# Altium PCB expansion.PcbDoc
Units mil, origin at the board's own origin, x right, y up, seen from the top; angles counter-clockwise.
Board outline 910.59 x 872.97 mil, 4 copper layers (Top Layer, Layer SCL, Layer SDA, Bottom Layer), stack 14.156 mil thick; 15 components, 6 nets, 78 pads, 33 vias.
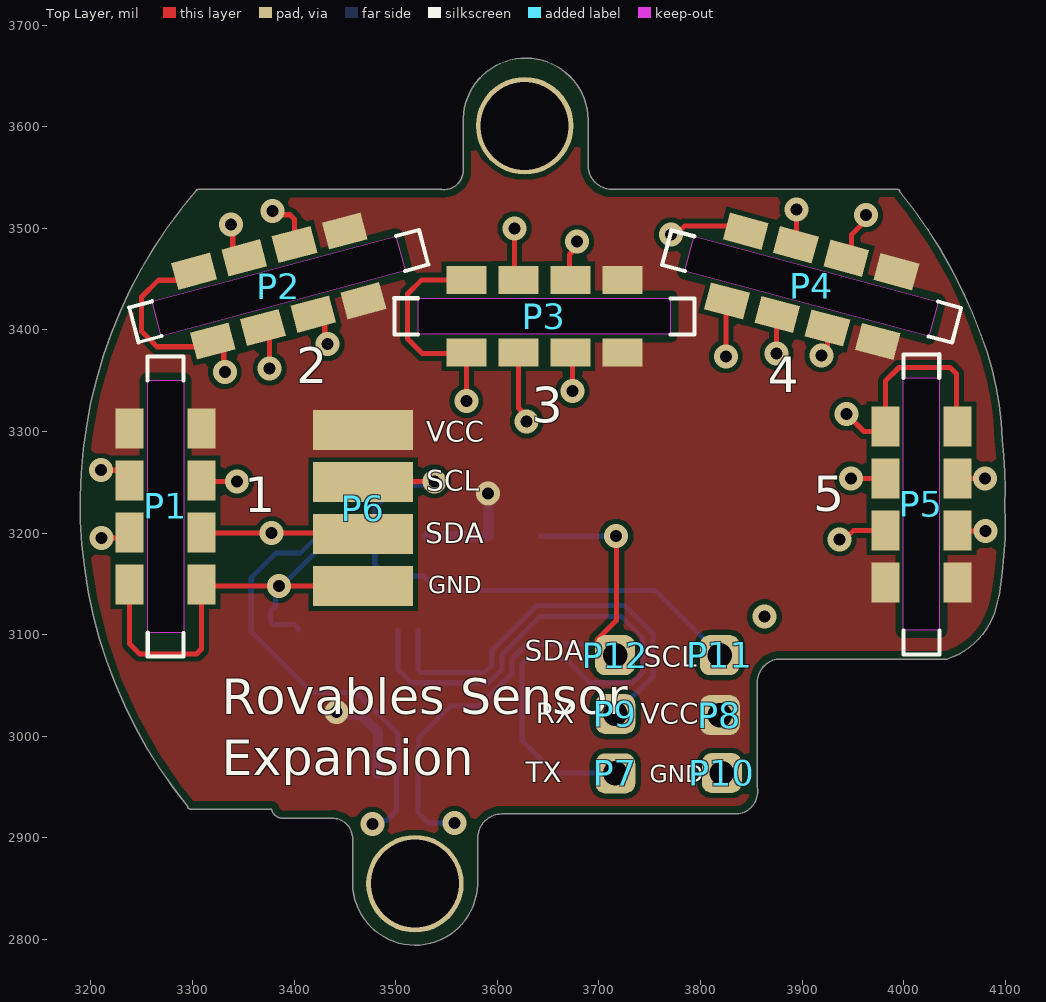
[diagram p0: Top Layer view]
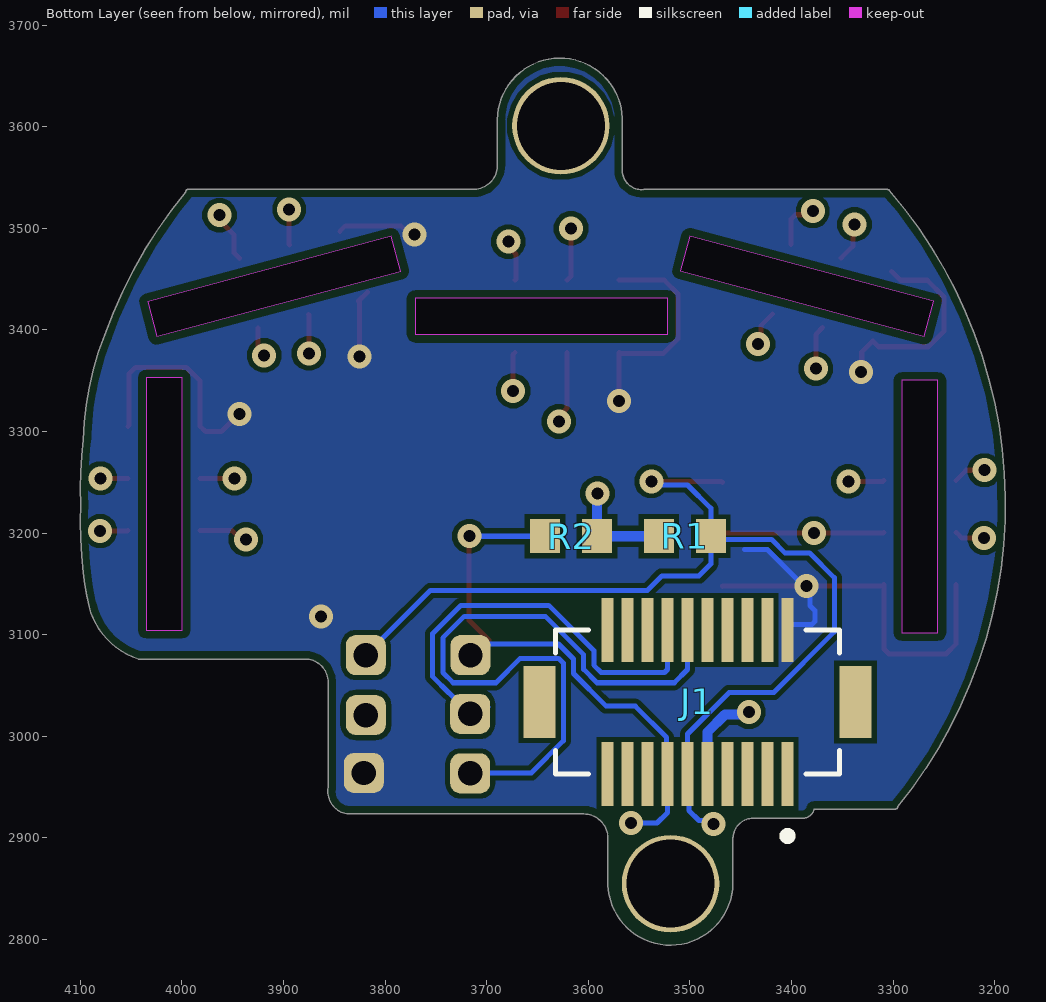
[diagram p1: Bottom Layer view, seen from below]
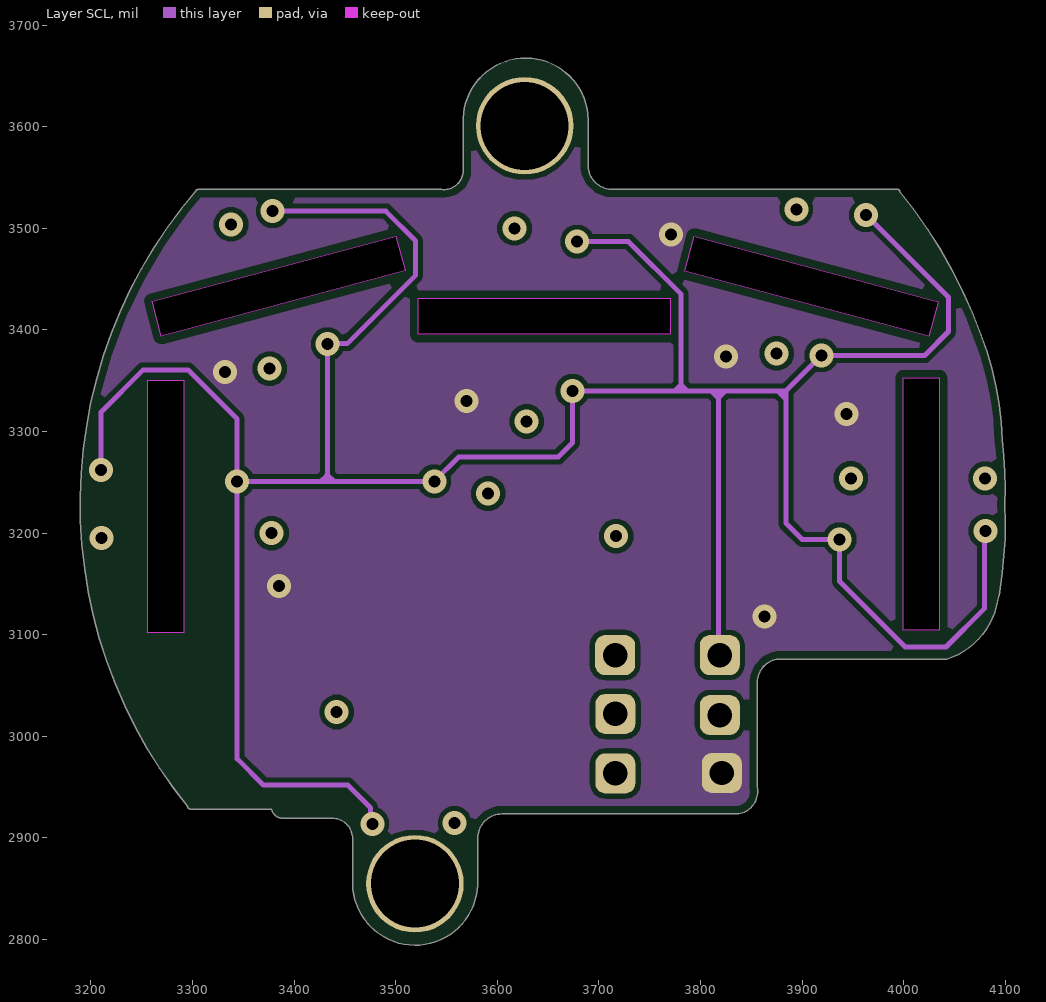
[diagram p2: Layer SCL]
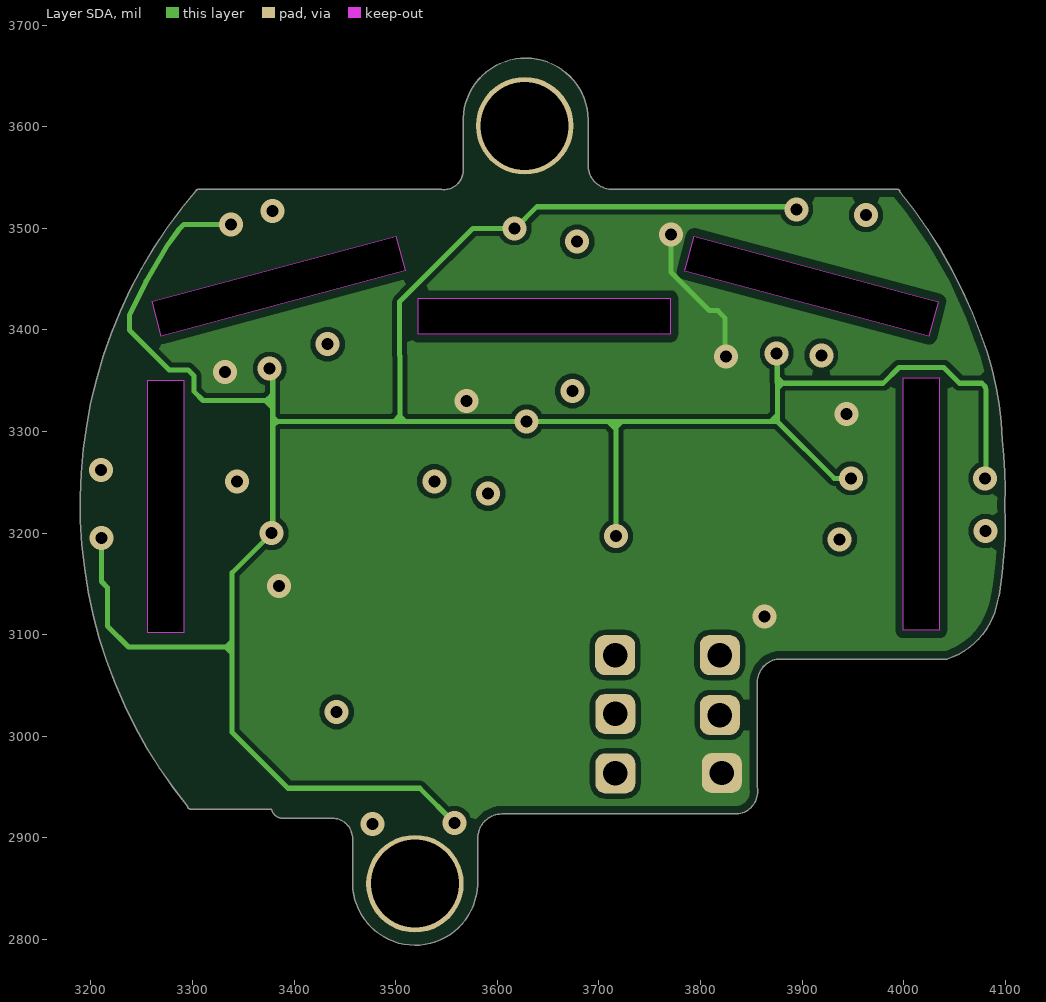
[diagram p3: Layer SDA]
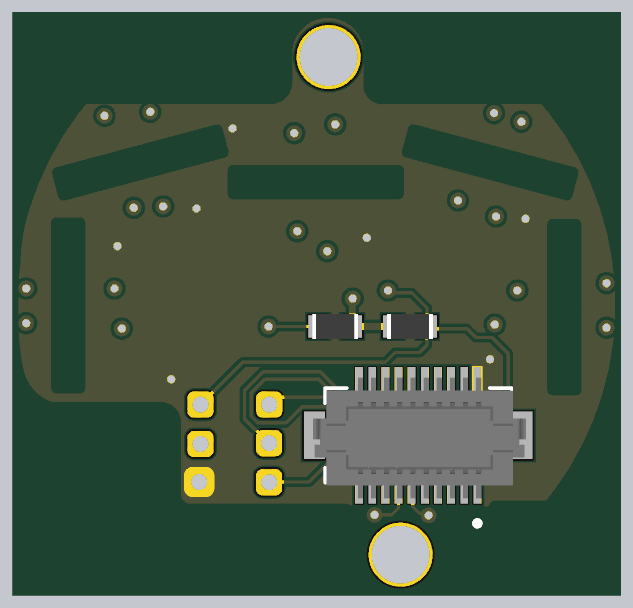
[diagram p4: 3D render of the assembled board from below, using the file's embedded part models]

## Layer stack, top to bottom
Top Solder: solder mask 0.4, Solder Resist, Dk 3.5
Top Layer: signal copper 1.4
Dielectric 2: prepreg 2.8, PP-006, Dk 4.1
Layer SCL: signal copper 1.378
Dielectric 3: prepreg 2.8, PP-006, Dk 4.1
Layer SDA: signal copper 1.378
Dielectric 1: core 3, FR-4, Dk 4.2
Bottom Layer: signal copper 1.4
Bottom Solder: solder mask 0.4, Solder Resist, Dk 3.5

## Board outline
3388.99,2919.49 3436,2919.49 ccw(c3436,2921.97) 3436.17,2919.49 cw(c3437.55,2899.49) 3457.59,2900.91 3457.59,2855 ccw(c3460.62,2854.99) 3457.6,2854.88 cw(c3462.69,2855.03) 3457.59,2855.02 cw(c3460.52,2855.06) 3457.59,2855.06 3457.6,2854.88 ccw(c3519.14,2856) 3580.69,2853.78 ccw(c3580.33,2853.85) 3580.7,2854 3580.7,2899.93 cw(c3604.72,2899.63) 3604.47,2923.68 3837.68,2923.68 ccw(c3833.68,2945.99) 3856,2950 3856,3030.26 3856,3053.35 cw(c3878.95,3053.23) 3878.83,3076.17 3982.51,3076.17 4043,3076.17 ccw(c4019.95,3146.21) 4091.3,3127.6 ccw(c3903.99,3176.75) 4097,3161 ccw(c3710.05,3210.11) 4099.69,3228.03 ccw(c3728.16,3244.44) 4097,3292 ccw(c3798.55,3284.77) 4091.3,3343.26 ccw(c3786.77,3282.21) 4076.15,3395.03 ccw(c3627.16,3233.78) 3996.3,3535.99 ccw(c3996.28,3535.99) 3996.27,3536 ccw(c3993.79,3536.03) 3993.76,3538.51 3714,3538.51 ccw(c3713.94,3538.47) 3713.88,3538.51 cw(c3713.01,3561.99) 3689.53,3561.1 ccw(c3689.18,3561.19) 3689.51,3561.35 3689.51,3606 ccw(c3688.62,3606.16) 3689.46,3606.48 ccw(c3688.45,3606.85) 3689.51,3607 ccw(c3689.5,3607.02) 3689.51,3607.04 ccw(c3627.95,3606.05) 3566.42,3608.3 ccw(c3568.07,3608.05) 3566.41,3608 3566.41,3555.08 ccw(c3568.9,3555.08) 3566.43,3554.72 cw(c3547.46,3557.33) 3545.3,3538.3 cw(c3545.29,3538.29) 3545.28,3538.3 3545.3,3538.3 ccw(c3545.13,3537.99) 3545,3538.32 3305.63,3538.29 ccw(c3305.51,3536.01) 3303.71,3537.42 ccw(c3662.6,3229.11) 3295.33,2930.84 ccw(c3297.84,2931) 3297.84,2928.49 3377.76,2928.49 ccw(c3389,2931)

## Design rules (kind name [scope] priority, off if disabled: settings)
BoardOutlineClearance [All] p1: gap=7.87 ignorepadtopadclearanceinfootprint=FALSE
Clearance [All] p1: gap=5 ignorepadtopadclearanceinfootprint=FALSE except(9.84: Arc-Hole Track-Hole SMDPad-Hole THPad-Hole Via-Hole Fill-Hole Poly-Hole Region-Hole Text-Hole)
ComponentClearance [All] p1: gap=5 collisioncheckmode=3 verticalgap=5 showdistances=TRUE
DiffPairsRouting [All] p1: maxlimit=10 minlimit=5 mostfreqgap=10 toplayer_prefgap=5 toplayer_minwidth=5 toplayer_maxwidth=1000 toplayer_prefwidth=5 midlayer1_mingap=10 midlayer1_minwidth=15 midlayer1_maxwidth=15 midlayer1_prefwidth=15 midlayer2_mingap=10 midlayer2_minwidth=15 midlayer2_maxwidth=15 midlayer2_prefwidth=15 bottomlayer_prefgap=5 bottomlayer_minwidth=5 bottomlayer_maxwidth=1000 bottomlayer_prefwidth=5 maxuncoupledlength=500
Height [All] p1: minheight=0 maxheight=71497.94 prefheight=500
HoleSize [All] p1: absolutevalues=TRUE maxlimit=248.03 minlimit=11.81 maxpercent=80.000 minpercent=20.000
HoleToHoleClearance [All] p1: gap=9.84 allowstackedmicrovias=FALSE
MinimumAnnularRing [All] p1: minimumring=3
MinimumSolderMaskSliver [All] p1: minsoldermaskwidth=0
PlaneClearance [All] p1: clearance=5
PlaneConnect PlaneConnectPowerPads [InPadClass('PowerPads')] p1: planeconnectstyle=Direct reliefexpansion=20 reliefentries=4 reliefconductorwidth=10 reliefairgap=10
PlaneConnect [All] p2: planeconnectstyle=Direct reliefexpansion=11.81 reliefentries=4 reliefconductorwidth=5 reliefairgap=5
PolygonConnect PolygonConnectPowerPads [All vs (InPadClass('PowerPads'))] p1: connectstyle=Direct reliefconductorwidth=10 reliefentries=4 polygonreliefangle="90 Angle" airgapwidth=10
PolygonConnect [All] p2: connectstyle=Direct reliefconductorwidth=5 reliefentries=4 polygonreliefangle="90 Angle" airgapwidth=5
RoomDefinition expansion [InComponentClass('expansion')] p1: confinementstyle=ConfineIn formatcopy=TRUE lockcomponents=FALSE outline 0,0 2000,0 2000,1000 0,1000
RoutingVias [All] p1: holewidth=11.81 width=23.62 viastyle="Through Hole" minholewidth=11.81 minwidth=23.62 maxholewidth=23.62 maxwidth=259.84
SilkToSilkClearance [All] p1: silktosilkclearance=0
SilkToSolderMaskClearance [IsPad] p1: minsilkscreentomaskgap=5 clearancetoexposedcopper=TRUE
SolderMaskExpansion [All] p1: expansion=2.95 istentingtop=FALSE
Width [All] p1: maxlimit=1000 minlimit=5 preferedwidth=5 midlayer1_maxwidth=10 midlayer2_maxwidth=10 minimp=50.000000 maximp=50.000000 favimp=50.000000
20 further rules are at their usual default settings.

## Components (designator, comment, footprint, x,y, rotation, side; value= is the part's Value field where it differs from the comment)
J1 "DF12NB(3.0)-20DS-0.5V(51)" HRS_DF12NB(3.0)-20DS-0.5V(51) 3492.58,3033.87 r180 bottom
P1 "vertical_4pos_conn" "vertical_4pos_conn _s_square" 3255.85,3303.18 r0 top
P2 "vertical_4pos_conn" "vertical_4pos_conn _s_square" 3454.51,3480.19 r285 top
P3 "vertical_4pos_conn" "vertical_4pos_conn _s_square" 3723.18,3431.15 r270 top
P4 "vertical_4pos_conn" "vertical_4pos_conn _s_square" 3988.19,3440.09 r255 top
P5 "vertical_4pos_conn" "vertical_4pos_conn _s_square" 4035.15,3151.64 r180 top
P6 "vertical_4pos_conn" 4pos_conn_tof 3468,3301.36 r0 top
P7 "BB_TEST_TH" BB_WIRE_TEST_TH 3716.19,2963.59 r0 top
P8 "BB_TEST_TH" BB_WIRE_TEST_TH 3819,3021 r0 top
P9 "BB_TEST_TH" BB_WIRE_TEST_TH 3716.19,3022.12 r0 top
P10 "BB_TEST_TH" BB_WIRE_TEST_TH 3821,2964 r90 top
P11 "BB_TEST_TH" BB_WIRE_TEST_TH 3819,3080 r90 top
P12 "BB_TEST_TH" BB_WIRE_TEST_TH 3716,3080 r90 top
R1 "ERJ3EKF1002V" RESC1609X55X30LL15T15 3505,3197 r0 bottom
R2 "ERJ3EKF1002V" RESC1609X55X30LL15T15 3617,3197 r180 bottom

## Footprints (in the part's own frame and the unit in brackets; to place one, negate y for a bottom-side part, rotate by r counter-clockwise, add the part's x,y. Pads: shape width x height; smd on the part's side, far side on the other; paste and mask are expansions set on the pad)
4pos_conn_tof [mm]
  rect 2.5x1 smd: 1(0,0) 2(0,-1.3) 3(0,-2.6) 4(0,-3.9)
BB_WIRE_TEST_TH [mm]
  rrect50% 1x1 hole 0.61: 1(0,0)
HRS_DF12NB(3.0)-20DS-0.5V(51) [mm]
  rect 0.3x1.6 smd paste-2 mask+0.05: 1(2.25,-1.8) 2(2.25,1.8) 3(1.75,-1.8) 4(1.75,1.8) 5(1.25,-1.8) 6(1.25,1.8) 7(0.75,-1.8) 8(0.75,1.8) 9(0.25,-1.8) 10(0.25,1.8) 11(-0.25,-1.8) 12(-0.25,1.8) 13(-0.75,-1.8) 14(-0.75,1.8) 15(-1.25,-1.8) 16(-1.25,1.8) 17(-1.75,-1.8) 18(-1.75,1.8) 19(-2.25,-1.8) 20(-2.25,1.8)
  rect 0.8x1.8 smd: S1(3.95,0) S2(-3.95,0)
  silkscreen extent -3.55,-3.45 3.55,1.8, body extent -4,-2.4 4.1,2.2, height 2.2
RESC1609X55X30LL15T15 [mm] "Chip Resistor, 2-Leads, Body 1.75x0.95mm, IPC High Density"
  rect 0.75x0.85 smd: 1(-0.65,0) 2(0.65,0)
  body extent -0.87,-0.48 0.87,0.48, height 0.55
"vertical_4pos_conn _s_square" [mm]
  rect 0.7x1 smd: 1(-0.455,0) 1(1.35,0) 2(-0.455,-1.3) 2(1.35,-1.3) 3(-0.455,-2.6) 3(1.35,-2.6) 4(-0.455,-3.9) 4(1.35,-3.9)
  Keep-Out Layer board cut-out: 0,1.2 0.9,1.2 0.9,-5.11 0,-5.11
  silkscreen extent 0,-5.7 0.9,1.8

## Part data
J1: Package=None, Availability=Unavailable, MP=DF12NB(3.0)-20DS-0.5V(51), Price=None
R1 R2: library part CMP-1012-00623-3, "Chip Resistor, 10 KOhm, +/- 1%, 0.1 W, -55 to 155 degC, 0603 (1608 Metric), RoHS, Tape and Reel", Case Code (Imperial)=0603, Case Code (Metric)=1608, manufacturer=Panasonic, Max Operating Temperature=155degC, Max Power Dissipation=100mW, Min Operating Temperature=-55degC, Package Description="2-Pin Surface Mount Device, Body 1.6 x 0.85 mm", Package Quantity=1, Package Reference=603, Resistance=10KOhm, Temperature Coefficient=100ppm\/degreesC, Tolerance=1%, Voltage Rating=75V, Case\/Package=0603, Composition=ThickFilm, Contact Plating=Tin, Datasheet URL=https://industrial.panasonic.com/cdbs/www-data/pdf/RDA0000/AOA0000C304.pdf, Datasheet Version=02/2017, Depth=0.8mm, Height=0.45mm, Lead Free=LeadFree, Length=1.6mm, Manufacturer URL=http://www.panasonic.com/, Military Standard=Not, Mount=SurfaceMount, Mounting Technology=SurfaceMount, Number of Pins=2, Number of Terminations=2, Packaging=TapeandReel, Power Rating=100mW, Radiation Hardening=No, REACH SVHC=NoSVHC, RoHSCompliant=true, Termination=SMD/SMT, Voltage Rating (DC)=75V, Width=0.031inch

## Free pads (board coordinates)
  round 96 hole 86.61: 1(3519,2855) 1(3627,3601)

## Via types
v1: diameter 23.62, hole 11.81, Top Layer to Bottom Layer, tented both sides, 33 vias

## Nets (pads, with @x,y where several pads share a name; then routed paths per layer and width w, separated by ;. In a path a pad name is that pad's centre, name@x,y a point inside that pad or via, vN(x,y) a via of type N, cw(c..) or ccw(c..) an arc to the next point about the centre after c; other vN are vias at no path point)
GND: J1.2 P1.4 P2.4 P3.4 P4.4 P5.4 P6.4 P10.1 | length 1454.9
  Top Layer w5: P1.4@3237.94,3149.64 3237.94,3091.06 3248,3081 3304,3081 3309,3086 3309,3149.64 3310.64,3148 3467.82,3148 P6.4 ; P2.4@3301.56,3457.75 3292.79,3448.98 3266.37,3448.98 3249.81,3432.42 3249.81,3398.77 3265.06,3383.52 3314.36,3383.52 3319.96,3389.11 3330.82,3378.25 3330.82,3359.56 v1(3331.79,3358.59) ; v1(3569.64,3330) 3569.64,3378 3568.64,3377 3526.05,3377 3511.63,3391.42 3511.63,3435.45 3525.24,3449.06 P3.4@3569.64,3449.06 ; v1(3771,3494) 3776.04,3494 3784.57,3502.54 3839.12,3502.54 P4.4@3844.52,3497.13 ; P4.4@3817.35,3437.27 3826.13,3428.49 3825,3427.37 v1(3825,3374) ; v1@3946.17,3317.5 v1(3943.5,3317.5) 3961,3300 3976.82,3300 3982,3305.18 3982,3349.77 3995.42,3363.19 4045.81,3363.19 4052,3357 4052,3306.24 P5.4@4053.06,3305.18
  Layer SDA w5: v1(3771,3494) 3771,3456.96 3808.96,3419 3817,3419 3824,3412 3824,3375 v1(3825,3374)
  Bottom Layer w5: J1.2 3404,3106.59 3400.59,3110 3380,3110 3377,3113 3377,3123.98 3381.71,3128.69 3381.71,3144.71 3384.71,3144.71 3423.93,3183.93 3446.47,3183.93
  other v1: 3863,3118 3385,3148
RX: J1.14 P9.1 | length 415.9
  Bottom Layer w5: J1.14 3522.11,3065.74 3525.04,3062.81 3587.25,3062.81 3594.57,3070.13 3594.57,3084.56 3639.01,3129 3725.35,3129 3753.19,3101.17 3753.19,3058.83 3737.17,3042.81 3736.89,3042.81 P9.1 ; P9.1@3699,3029 P9.1@3701.7,3029
SCL: J1.11 P1.2 P2.2 P3.2 P4.2 P5.2 P6.2 P11.1 R1.1 | length 4570.6
  Top Layer w5: v1(3210.16,3261.97) 3227.96,3261.97 P1.2@3237.94,3252 ; P1.2@3309,3252 3310,3251 v1(3344,3251) ; v1(3379,3517) 3382.56,3513.44 3396.03,3513.44 3400.44,3509.03 P2.2@3400.44,3484.25 ; P2.2@3418.83,3415.61 3430.19,3404.25 3430.19,3388.81 v1(3433,3386) ; P6.2 3468.82,3251 v1(3538,3251) ; P3.2@3672,3378 3674,3376 v1(3674,3340) ; P3.2@3672,3449.06 3671,3450.06 3671,3474.29 3678.65,3481.93 v1(3678.65,3486.97) ; v1(3919,3375) 3925,3381 P4.2@3925,3402 ; v1(3937,3194) 3942.04,3194 3950.86,3202.82 P5.2@3982,3202.82 ; P4.2@3943.39,3470.64 3948.66,3475.91 3948.66,3493.62 3963,3507.96 v1(3963,3513) ; P5.2@4053.06,3202.82 4053.78,3202.1 v1(4080.4,3202.1)
  Layer SCL w5: v1(3210.16,3261.97) 3210.16,3319.4 3251.55,3360.8 3295.58,3360.8 3344,3312.38 v1(3344,3251) 3344,2978 3370,2952 3453,2952 3475.35,2929.65 3475.35,2915.65 v1(3477,2914) ; v1@3344.23,3250.77 3426.31,3250.77 ; v1(3379,3517) 3490.23,3517 3519.69,3487.54 3519.69,3453.9 3452.31,3386.52 3433.52,3386.52 v1(3433,3386) 3433,3256.59 ; 3438.8,3251.27 3433.48,3256.59 3433,3256.59 ; v1@3537.77,3250.77 3433,3250.77 ; v1(3538,3251) 3562,3275 3660,3275 3674,3289 v1(3674,3340) 3781,3340 ; v1(3678.65,3486.97) 3729.27,3486.97 3781,3435.25 3781,3346.11 ; 3775.12,3340.58 3780.66,3346.11 3781,3346.11 ; 3786.01,3340.04 3786.01,3341.1 3781,3346.11 ; P11.1@3817.84,3093.02 3817.84,3333.62 ; 3824.2,3339.69 3818.13,3333.62 3817.84,3333.62 ; 3883.25,3333.05 3877.42,3338.88 3877.42,3340 ; v1(3963,3513) 3963.36,3513 4044.2,3432.16 4044.2,3398.51 4020.69,3375 v1(3919,3375) 3884,3340 ; v1(4080.4,3202.1) 4079.77,3201.47 4079.77,3126.04 4041.71,3087.99 4001.45,3087.99 3937,3152.44 v1(3937,3194) 3900,3194 3884,3210 3884,3340 ; 3426.31,3250.77 3433,3250.77 ; 3426.31,3250.77 3432.12,3256.59 3433,3256.59 ; 3433,3250.77 3433,3256.59 ; 3781,3340 3810.64,3340 ; 3781,3340 3781,3346.11 ; 3810.64,3340 3819,3340 ; 3810.64,3340 3817.01,3333.62 3817.84,3333.62 ; 3817.84,3333.62 3817.84,3338.84 3819,3340 ; 3819,3340 3877.42,3340 ; 3877.42,3340 3884,3340
  Bottom Layer w5: v1(3477,2914) 3480.18,2917.18 3491.13,2917.18 3500.88,2926.93 3500.88,2961.46 J1.11 3502.43,3002.25 3461.37,3043.31 3417.41,3043.31 3357.84,3102.88 3357.84,3156.15 3382.38,3180.69 3406.55,3180.69 3419.78,3193.93 3476.33,3193.93 R1.1 ; v1(3538,3251) 3534.44,3247.44 3502.29,3247.44 3479.41,3224.56 R1.1 ; P11.1 3755.27,3143.73 3541.76,3143.73 3527.49,3158 3491,3158 3479.41,3169.59 R1.1
SDA: J1.13 P1.3 P2.3 P3.3 P4.3 P5.3 P6.3 P12.1 R2.1 | length 4004.4
  Top Layer w5: v1(3210.41,3195.27) 3232.39,3195.27 P1.3@3237.94,3200.82 ; P1.3@3309,3200.82 3309.82,3200 v1(3378,3200) 3467,3200 P6.3 ; v1(3338,3504) 3339.64,3502.36 3339.64,3482.36 P2.3@3351,3471 ; P2.3@3369.39,3402.36 3376,3395.75 v1(3376,3362) ; v1(3617,3500) 3617,3452.88 P3.3@3620.82,3449.06 ; P3.3@3620.82,3378 3620.82,3323.22 3629,3315.04 v1(3629,3310) ; P12.1@3698,3091 3698,3094.97 3717.33,3114.3 3717.33,3196.67 v1(3717,3197) ; v1(3875,3377) 3875,3414.68 P4.3@3875.56,3415.25 ; P4.3@3893.96,3483.89 3894.41,3484.34 v1(3894.41,3518.83) ; v1(3948,3254) P5.3@3982,3254 ; P5.3@4053.06,3254 v1(4080.28,3254)
  Layer SDA w5: v1(3210.41,3195.27) 3210.41,3152.41 3216.49,3146.33 3216.49,3108.51 3237,3088 3333.38,3088 ; v1(3338,3504) 3291.68,3504 3286.99,3499.31 3286.46,3498.69 3274.96,3482.66 3254.39,3448.02 3237.94,3413.85 3237.94,3412.71 3237.94,3410.64 3237.94,3399.83 3276.97,3360.8 3295.58,3360.8 3301.66,3354.72 3301.66,3339.34 3310.31,3330.69 3372.17,3330.69 ; 3338.72,3081.89 3333.38,3087.23 3333.38,3088 ; 3338.88,3093.5 3333.38,3088 ; v1(3376,3362) 3379,3359 3379,3330.69 ; 3377.86,3324.45 3372.17,3330.15 ; 3378.05,3335.84 3372.9,3330.69 ; 3382.98,3310.6 3379,3314.59 ; 3383.17,3310.04 3383.14,3310 ; 3499.34,3310.8 3504.35,3315.81 ; 3508.78,3310.41 3504.35,3314.84 ; v1(3558,2914.69) 3523.69,2949 3394,2949 3339.1,3003.9 3339.1,3088 ; 3716.88,3303.55 3715.7,3303.55 3709.24,3310 ; v1(3717,3197) 3717,3304.41 ; 3723.67,3310.01 3722.6,3310.01 ; v1(3875,3377) 3875.56,3376.44 3875.56,3353.49 ; 3875.24,3315.95 3869.67,3310.37 3869.67,3310 ; 3875.56,3354.39 3875.56,3353.49 ; 3880.43,3347.28 3876.4,3343.24 3875.64,3343.24 ; 3880.43,3348.62 3875.56,3353.49 ; v1(3894.41,3518.83) 3891.93,3521.31 3638.96,3521.31 3617.65,3500 3576,3500 3503.98,3427.98 3503.98,3374.87 3504.35,3374.49 3504.35,3315.81 ; v1(3948,3254) 3931.62,3254.02 3875.64,3310 ; v1(4080.28,3254) 4081.23,3254.95 4081.23,3340.73 4080.65,3343.6 4079.85,3344.69 4076.92,3347.62 4055.02,3347.62 4039.45,3363.19 3995.42,3363.19 3979.84,3347.62 3876.38,3347.62 3875.64,3348.36 ; 3333.38,3088 3339.1,3088 ; 3339.1,3088 3339.1,3161.1 v1(3378,3200) 3379,3201 3379,3305.86 ; 3372.17,3330.15 3372.36,3330.15 3372.9,3330.69 ; 3372.17,3330.15 3372.17,3330.69 ; 3372.17,3330.69 3372.9,3330.69 ; 3372.9,3330.69 3379,3330.69 ; 3379,3305.86 3383.14,3310 ; 3379,3305.86 3379,3310 ; 3379,3310 3383.14,3310 ; 3379,3310 3379,3314.59 ; 3379,3314.59 3379,3330.69 ; 3383.14,3310 3504.35,3310 ; 3504.35,3310 3504.35,3314.84 ; 3504.35,3310 v1(3629,3310) 3709.24,3310 ; 3504.35,3314.84 3504.35,3315.81 ; 3709.24,3310 3716,3310 ; 3716,3310 3722.59,3310 ; 3716,3310 3717,3309 3717,3304.41 ; 3717,3304.41 3722.59,3310 ; 3722.59,3310 3869.67,3310 ; 3869.67,3310 3875.64,3310 ; 3875.56,3353.49 3875.56,3348.44 3875.64,3348.36 ; 3875.64,3310 3875.64,3343.24 ; 3875.64,3343.24 3875.64,3348.36
  Bottom Layer w5: v1(3558,2914.69) 3532.31,2914.69 3522.11,2924.89 3522.11,2988.59 3523.04,2989.52 3523.04,2999.07 3553.7,3029.72 3582.45,3029.72 3614.57,3061.85 3614.57,3076.27 3629.3,3091 3705,3091 P12.1 ; R2.1 v1(3717,3197)
TX: J1.12 P7.1 | length 673.7
  Bottom Layer w5: J1.12 3502.43,3065.74 3515.35,3052.81 3591.39,3052.81 3604.57,3065.99 3604.57,3080.41 3642.34,3118.19 3709.98,3118.19 3722.03,3118.18 3743.19,3097.03 3743.19,3062.97 3733.03,3052.81 3690.93,3052.81 3666.95,3076.8 3629.24,3076.8 3624.57,3072.13 3624.57,2995.6 3656.17,2964 3707.63,2964 P7.1@3708.63,2963 ; P7.1@3705,2969 P7.1@3706,2970
VCC: J1.9 P1.1 P2.1 P3.1 P4.1 P5.1 P6.1 P8.1 R1.2 R2.2 | length 193.6
  Bottom Layer w10: v1(3442,3024) 3444.61,3021.39 3465.61,3021.39 3482.74,3004.26 J1.9 ; R1.2 R2.2 ; v1(3591,3239) 3591.41,3238.59 R2.2 ; R2.2@3591.7,3197.3 R2.2
pads on no net: J1.1 J1.3 J1.4 J1.5 J1.6 J1.7 J1.8 J1.10 J1.15 J1.16 J1.17 J1.18 J1.19 J1.20 J1.S1 J1.S2

## Polygon pours and split planes (outlines as drawn)
GND on Bottom Layer "GND_L04_P002" (solid, remove dead copper, pour order 2): 4120,3679.8 4120,2781 3156.93,2781 3161.06,3678.22
VCC on Top Layer "VCC_L01_P005" (solid, remove dead copper, pour order 5): 3189,3669 4103,3669 4103,2791 4100,2794 3191,2794 3191,3667
GND on Layer SCL "GND_L02_P007" (solid, remove dead copper, pour order 7): 3172,3674 4138,3674 4138,2761.5 4100.5,2799 3172,2799
GND on Layer SDA "GND_L03_P006" (solid, remove dead copper, pour order 6): 3190,3669 4104,3669 4104,2791 4101,2794 3192,2794 3192,3667

## Silkscreen, mask and mechanical layers (free items; w line width, h text height)
Top Overlay:
  text "2" at 3401.94,3336 h60
  text "4" at 3866,3327 h60
  text "3" at 3634,3296.67 h60
  text "VCC" at 3530,3290 h20
  text "SCL" at 3530,3242 h20
  text "5" at 3911,3209.67 h60
  text "1" at 3351,3209 h60
  text "SDA" at 3529,3190 h20
  text "GND" at 3532,3141 h17
  text "SDA" at 3626.91,3074.46 h20
  text "SCL" at 3744.2,3068.38 h20
  text "RX" at 3638,3013 h20
  text "VCC" at 3741.17,3012.28 h20
  text "TX" at 3628,2955 h20
  text "GND" at 3750,2955 h17
  text "Rovables Sensor  / Expansion" at 3329,2950 h60
Mechanical 1:
  drawing of 368 lines, arcs and shapes, not listed
Mechanical 15:
  circle w10: c3647,3231 r472.44
  circle w3.94: c3516,2855 r69.88
  circle w3.94: c3627,3601 r69.88
  circle w5: c3627.98,3597.89 r39.37
  circle w5: c3519.13,2869.11 r39.37